# EAGLE board FTDI Basic_GiantPanel_3.3V_v24a (EAGLE 7.2.0), part 1 of 4
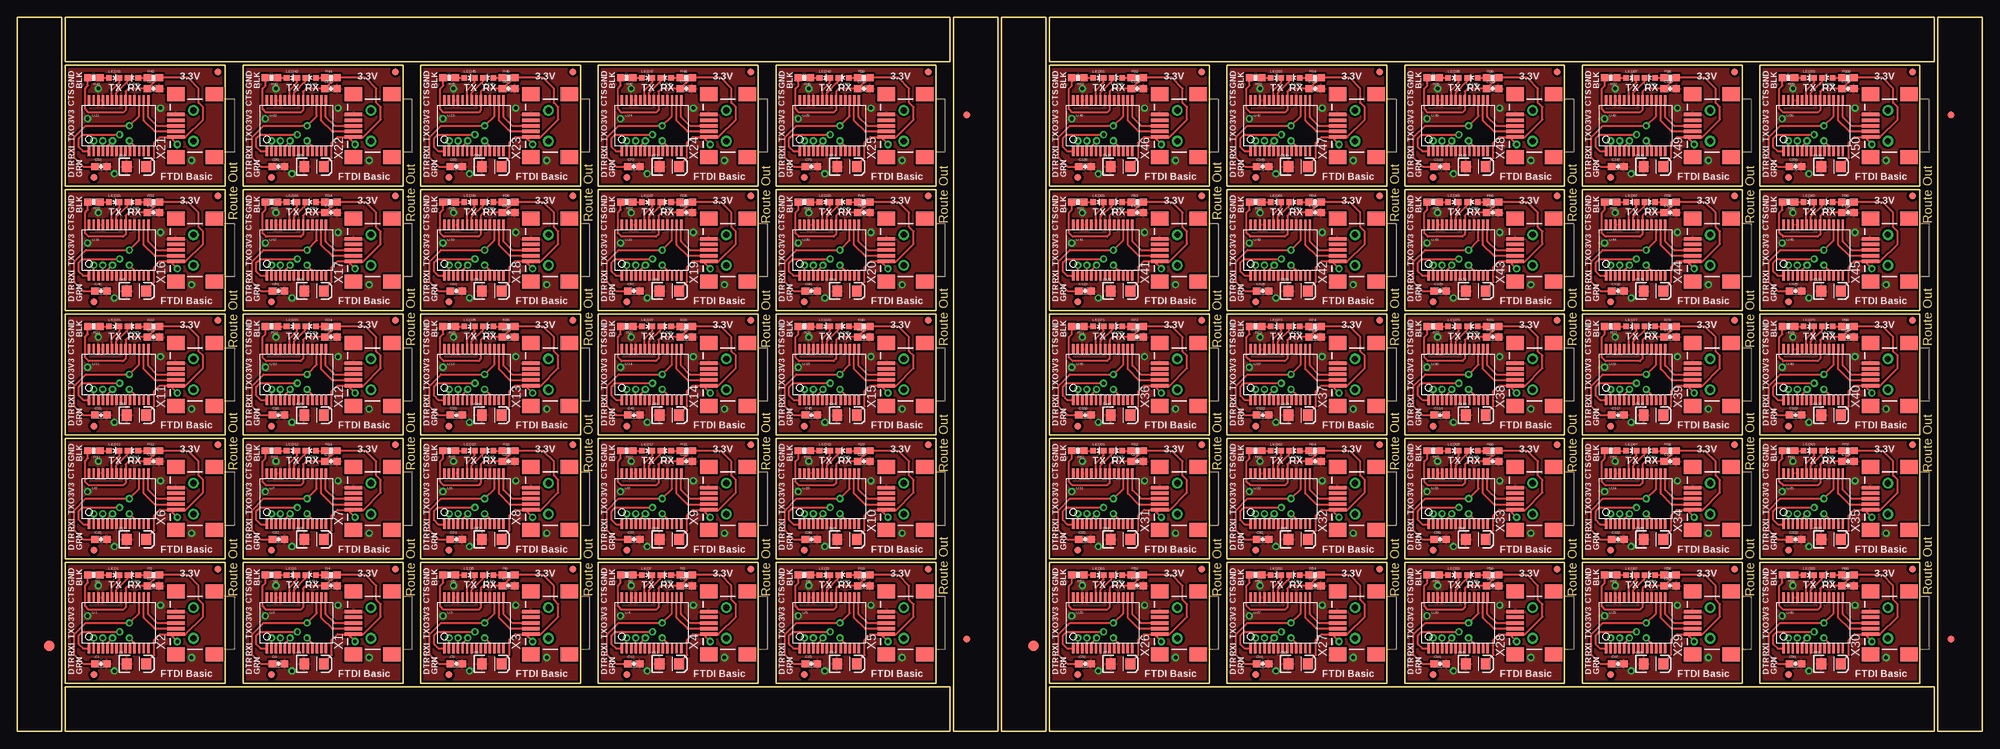
[diagram p0: board, top side]
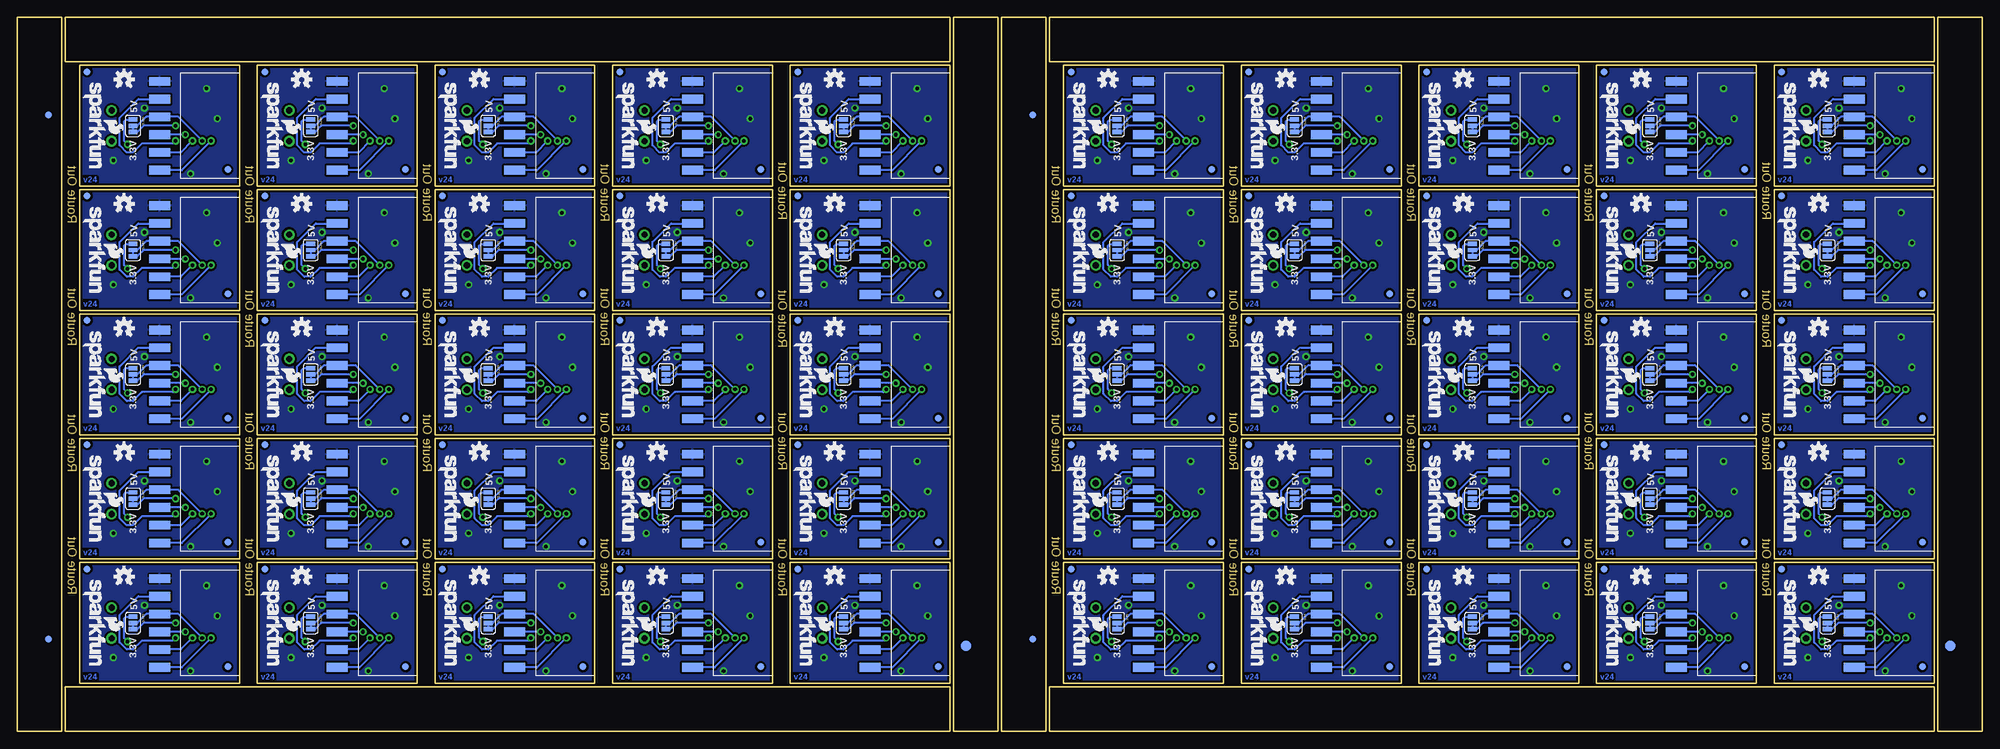
[diagram p1: board, bottom side, seen from below]

Size 280.92 x 102.11 mm. Coordinates in mm from the lower left corner, seen from the top.
Outline: 240 segments
Copper layers (1*16): Top 0.035mm / dielectric 1.5mm / Bottom 0.035mm
Design rules "SparkFun": minimum track width 8mil, minimum drill 20mil, track to track 8mil, track to pad 8mil, pad to pad 8mil, via to via 8mil, smd to smd 8mil, copper to edge 8mil, drill to drill 8mil, minimum pad ring 12mil, minimum via ring 10mil, stop-mask expansion 4mil, vias tented up to drill 20mil, thermal gap 10mil
Net classes: 0 default: width 0.203 mm; 1 power: width 0.254 mm

## Footprints (pad centres in the part's own frame; a part is rotated, then mirrored left to right if it is on the bottom)
0603-CAP = smd 1.1 x 1: 1 -0.85,0; 2 0.85,0
EIA3216 = smd 1.4 x 1.6: A 1.4,0; C -1.4,0
FIDUCIAL-1.5X3 = smd 1.5 x 1.5: 1 0,0
FIDUCIAL-1X2 = smd 1 x 1: 1 0,0
1X06-SMD-FEMALE-V2 = smd 1.25 x 3: 1 6.35,3.425; 2 3.81,3.425; 3 1.27,3.425; 4 -1.27,3.425; 5 -3.81,3.425; 6 -6.35,3.425
LED-0603 = smd 0.8 x 0.8: A 0,-0.75; C 0,0.75
0603-RES = smd 1.1 x 1: 1 -0.85,0; 2 0.85,0
SJ_3 = smd 0.635 x 1.27: 1 -0.889,0; 2 0,0; 3 0.889,0
SSOP28DB = smd 0.348 x 1.397: 1 -4.225,-3.656; 2 -3.575,-3.656; 3 -2.925,-3.656; 4 -2.275,-3.656; 5 -1.625,-3.656; 6 -0.975,-3.656; 7 -0.325,-3.656; 8 0.325,-3.656; 9 0.975,-3.656; 10 1.625,-3.656; 11 2.275,-3.656; 12 2.925,-3.656; 13 3.575,-3.656; 14 4.225,-3.656; 15 4.225,3.656; 16 3.575,3.656; 17 2.925,3.656; 18 2.275,3.656; 19 1.625,3.656; 20 0.975,3.656; 21 0.325,3.656; 22 -0.325,3.656; 23 -0.975,3.656; 24 -1.625,3.656; 25 -2.275,3.656; 26 -2.925,3.656; 27 -3.575,3.656; 28 -4.225,3.656
USB-MINIB-NOSTOP = smd 2.5 x 0.5: D+ 2.5,0; D- 2.5,0.8; GND 2.5,-1.6; ID 2.5,-0.8; VBUS 2.5,1.6 | smd 2.5 x 2: G1 -3,-4.5; G2 -3,4.5; G3 2.5,4.5; G4 2.5,-4.5 | drill 0.9 pad 0.8: H1 0,2.2 | drill 0.9 pad 0.787: H2 0,-2.2

## Placement (x,y rotation side)
C1  0.1uF  [0603-CAP]  11.94,9.65 0 top
C2  0.1uF  [0603-CAP]  19.43,20.83 0 top
C3  0.1uF  [0603-CAP]  44.83,20.83 0 top
C4  10uF  [EIA3216]  42.42,9.65 0 top
C5  10uF  [EIA3216]  17.02,9.65 0 top
C6  0.1uF  [0603-CAP]  37.34,9.65 0 top
C7  0.1uF  [0603-CAP]  70.23,20.83 0 top
C8  10uF  [EIA3216]  67.82,9.65 0 top
C9  0.1uF  [0603-CAP]  62.74,9.65 0 top
C10  0.1uF  [0603-CAP]  95.63,20.83 0 top
C11  10uF  [EIA3216]  93.22,9.65 0 top
C12  0.1uF  [0603-CAP]  88.14,9.65 0 top
C13  0.1uF  [0603-CAP]  121.03,20.83 0 top
C14  10uF  [EIA3216]  118.62,9.65 0 top
C15  0.1uF  [0603-CAP]  113.54,9.65 0 top
C16  0.1uF  [0603-CAP]  19.43,38.61 0 top
C17  10uF  [EIA3216]  17.02,27.43 0 top
C18  0.1uF  [0603-CAP]  11.94,27.43 0 top
C19  0.1uF  [0603-CAP]  44.83,38.61 0 top
C20  10uF  [EIA3216]  42.42,27.43 0 top
C21  0.1uF  [0603-CAP]  37.34,27.43 0 top
C22  0.1uF  [0603-CAP]  70.23,38.61 0 top
C23  10uF  [EIA3216]  67.82,27.43 0 top
C24  0.1uF  [0603-CAP]  62.74,27.43 0 top
C25  0.1uF  [0603-CAP]  95.63,38.61 0 top
C26  10uF  [EIA3216]  93.22,27.43 0 top
C27  0.1uF  [0603-CAP]  88.14,27.43 0 top
C28  0.1uF  [0603-CAP]  121.03,38.61 0 top
C29  10uF  [EIA3216]  118.62,27.43 0 top
C30  0.1uF  [0603-CAP]  113.54,27.43 0 top
C31  0.1uF  [0603-CAP]  19.43,56.39 0 top
C32  10uF  [EIA3216]  17.02,45.21 0 top
C33  0.1uF  [0603-CAP]  11.94,45.21 0 top
C34  0.1uF  [0603-CAP]  44.83,56.39 0 top
C35  10uF  [EIA3216]  42.42,45.21 0 top
C36  0.1uF  [0603-CAP]  37.34,45.21 0 top
C37  0.1uF  [0603-CAP]  70.23,56.39 0 top
C38  10uF  [EIA3216]  67.82,45.21 0 top
C39  0.1uF  [0603-CAP]  62.74,45.21 0 top
C40  0.1uF  [0603-CAP]  95.63,56.39 0 top
C41  10uF  [EIA3216]  93.22,45.21 0 top
C42  0.1uF  [0603-CAP]  88.14,45.21 0 top
C43  0.1uF  [0603-CAP]  121.03,56.39 0 top
C44  10uF  [EIA3216]  118.62,45.21 0 top
C45  0.1uF  [0603-CAP]  113.54,45.21 0 top
C46  0.1uF  [0603-CAP]  19.43,74.17 0 top
C47  10uF  [EIA3216]  17.02,62.99 0 top
C48  0.1uF  [0603-CAP]  11.94,62.99 0 top
C49  0.1uF  [0603-CAP]  44.83,74.17 0 top
C50  10uF  [EIA3216]  42.42,62.99 0 top
C51  0.1uF  [0603-CAP]  37.34,62.99 0 top
C52  0.1uF  [0603-CAP]  70.23,74.17 0 top
C53  10uF  [EIA3216]  67.82,62.99 0 top
C54  0.1uF  [0603-CAP]  62.74,62.99 0 top
C55  0.1uF  [0603-CAP]  95.63,74.17 0 top
C56  10uF  [EIA3216]  93.22,62.99 0 top
C57  0.1uF  [0603-CAP]  88.14,62.99 0 top
C58  0.1uF  [0603-CAP]  121.03,74.17 0 top
C59  10uF  [EIA3216]  118.62,62.99 0 top
C60  0.1uF  [0603-CAP]  113.54,62.99 0 top
C61  0.1uF  [0603-CAP]  19.43,91.95 0 top
C62  10uF  [EIA3216]  17.02,80.77 0 top
C63  0.1uF  [0603-CAP]  11.94,80.77 0 top
C64  0.1uF  [0603-CAP]  44.83,91.95 0 top
C65  10uF  [EIA3216]  42.42,80.77 0 top
C66  0.1uF  [0603-CAP]  37.34,80.77 0 top
C67  0.1uF  [0603-CAP]  70.23,91.95 0 top
C68  10uF  [EIA3216]  67.82,80.77 0 top
C69  0.1uF  [0603-CAP]  62.74,80.77 0 top
C70  0.1uF  [0603-CAP]  95.63,91.95 0 top
C71  10uF  [EIA3216]  93.22,80.77 0 top
C72  0.1uF  [0603-CAP]  88.14,80.77 0 top
C73  0.1uF  [0603-CAP]  121.03,91.95 0 top
C74  10uF  [EIA3216]  118.62,80.77 0 top
C75  0.1uF  [0603-CAP]  113.54,80.77 0 top
C76  0.1uF  [0603-CAP]  160.15,20.83 0 top
C77  10uF  [EIA3216]  157.73,9.65 0 top
C78  0.1uF  [0603-CAP]  152.65,9.65 0 top
C79  0.1uF  [0603-CAP]  185.55,20.83 0 top
C80  10uF  [EIA3216]  183.13,9.65 0 top
C81  0.1uF  [0603-CAP]  178.05,9.65 0 top
C82  0.1uF  [0603-CAP]  210.95,20.83 0 top
C83  10uF  [EIA3216]  208.53,9.65 0 top
C84  0.1uF  [0603-CAP]  203.45,9.65 0 top
C85  0.1uF  [0603-CAP]  236.35,20.83 0 top
C86  10uF  [EIA3216]  233.93,9.65 0 top
C87  0.1uF  [0603-CAP]  228.85,9.65 0 top
C88  0.1uF  [0603-CAP]  261.75,20.83 0 top
C89  10uF  [EIA3216]  259.33,9.65 0 top
C90  0.1uF  [0603-CAP]  254.25,9.65 0 top
C91  0.1uF  [0603-CAP]  160.15,38.61 0 top
C92  10uF  [EIA3216]  157.73,27.43 0 top
C93  0.1uF  [0603-CAP]  152.65,27.43 0 top
C94  0.1uF  [0603-CAP]  185.55,38.61 0 top
C95  10uF  [EIA3216]  183.13,27.43 0 top
C96  0.1uF  [0603-CAP]  178.05,27.43 0 top
C97  0.1uF  [0603-CAP]  210.95,38.61 0 top
C98  10uF  [EIA3216]  208.53,27.43 0 top
C99  0.1uF  [0603-CAP]  203.45,27.43 0 top
C100  0.1uF  [0603-CAP]  236.35,38.61 0 top
C101  10uF  [EIA3216]  233.93,27.43 0 top
C102  0.1uF  [0603-CAP]  228.85,27.43 0 top
C103  0.1uF  [0603-CAP]  261.75,38.61 0 top
C104  10uF  [EIA3216]  259.33,27.43 0 top
C105  0.1uF  [0603-CAP]  254.25,27.43 0 top
C106  0.1uF  [0603-CAP]  160.15,56.39 0 top
C107  10uF  [EIA3216]  157.73,45.21 0 top
C108  0.1uF  [0603-CAP]  152.65,45.21 0 top
C109  0.1uF  [0603-CAP]  185.55,56.39 0 top
C110  10uF  [EIA3216]  183.13,45.21 0 top
C111  0.1uF  [0603-CAP]  178.05,45.21 0 top
C112  0.1uF  [0603-CAP]  210.95,56.39 0 top
C113  10uF  [EIA3216]  208.53,45.21 0 top
C114  0.1uF  [0603-CAP]  203.45,45.21 0 top
C115  0.1uF  [0603-CAP]  236.35,56.39 0 top
C116  10uF  [EIA3216]  233.93,45.21 0 top
C117  0.1uF  [0603-CAP]  228.85,45.21 0 top
C118  0.1uF  [0603-CAP]  261.75,56.39 0 top
C119  10uF  [EIA3216]  259.33,45.21 0 top
C120  0.1uF  [0603-CAP]  254.25,45.21 0 top
C121  0.1uF  [0603-CAP]  160.15,74.17 0 top
C122  10uF  [EIA3216]  157.73,62.99 0 top
C123  0.1uF  [0603-CAP]  152.65,62.99 0 top
C124  0.1uF  [0603-CAP]  185.55,74.17 0 top
C125  10uF  [EIA3216]  183.13,62.99 0 top
C126  0.1uF  [0603-CAP]  178.05,62.99 0 top
C127  0.1uF  [0603-CAP]  210.95,74.17 0 top
C128  10uF  [EIA3216]  208.53,62.99 0 top
C129  0.1uF  [0603-CAP]  203.45,62.99 0 top
C130  0.1uF  [0603-CAP]  236.35,74.17 0 top
C131  10uF  [EIA3216]  233.93,62.99 0 top
C132  0.1uF  [0603-CAP]  228.85,62.99 0 top
C133  0.1uF  [0603-CAP]  261.75,74.17 0 top
C134  10uF  [EIA3216]  259.33,62.99 0 top
C135  0.1uF  [0603-CAP]  254.25,62.99 0 top
C136  0.1uF  [0603-CAP]  160.15,91.95 0 top
C137  10uF  [EIA3216]  157.73,80.77 0 top
C138  0.1uF  [0603-CAP]  152.65,80.77 0 top
C139  0.1uF  [0603-CAP]  185.55,91.95 0 top
C140  10uF  [EIA3216]  183.13,80.77 0 top
C141  0.1uF  [0603-CAP]  178.05,80.77 0 top
C142  0.1uF  [0603-CAP]  210.95,91.95 0 top
C143  10uF  [EIA3216]  208.53,80.77 0 top
C144  0.1uF  [0603-CAP]  203.45,80.77 0 top
C145  0.1uF  [0603-CAP]  236.35,91.95 0 top
C146  10uF  [EIA3216]  233.93,80.77 0 top
C147  0.1uF  [0603-CAP]  228.85,80.77 0 top
C148  0.1uF  [0603-CAP]  261.75,91.95 0 top
C149  10uF  [EIA3216]  259.33,80.77 0 top
C150  0.1uF  [0603-CAP]  254.25,80.77 0 top
E$1  [FIDUCIAL-1.5X3]  4.57,12.19 0 top
E$2  [FIDUCIAL-1.5X3]  4.57,12.19 0 bottom
E$3  [FIDUCIAL-1X2]  135.76,13.21 0 bottom
E$4  [FIDUCIAL-1X2]  135.76,13.21 0 top
E$5  [FIDUCIAL-1X2]  135.76,88.14 180 top
E$6  [FIDUCIAL-1X2]  135.76,88.14 180 bottom
E$7  [FIDUCIAL-1X2]  276.48,13.21 0 top
E$8  [FIDUCIAL-1X2]  276.48,88.14 180 top
E$9  [FIDUCIAL-1.5X3]  145.29,12.19 0 top
E$10  [FIDUCIAL-1.5X3]  145.29,12.19 0 bottom
E$11  [FIDUCIAL-1X2]  276.48,13.21 0 bottom
E$12  [FIDUCIAL-1X2]  276.48,88.14 180 bottom
JP1  [1X06-SMD-FEMALE-V2]  14.86,15.49 90 bottom
JP2  LOGO-SFESK  [SFE-LOGO-FLAME]  26.29,16.26 270 bottom
JP3  FIDUCIAL1X2  [FIDUCIAL-1X2]  10.92,8.1 0 top
JP4  FIDUCIAL1X2  [FIDUCIAL-1X2]  28.65,23.22 0 top
JP5  FIDUCIAL1X2  [FIDUCIAL-1X2]  8.53,9.25 0 bottom
JP6  FIDUCIAL1X2  [FIDUCIAL-1X2]  28.65,23.22 0 bottom
JP7  LOGO-SFESK  [SFE-LOGO-FLAME]  51.69,16.26 270 bottom
JP8  [1X06-SMD-FEMALE-V2]  40.26,15.49 90 bottom
JP9  FIDUCIAL1X2  [FIDUCIAL-1X2]  36.32,8.1 0 top
JP10  FIDUCIAL1X2  [FIDUCIAL-1X2]  54.05,23.22 0 top
JP11  FIDUCIAL1X2  [FIDUCIAL-1X2]  33.93,9.25 0 bottom
JP12  FIDUCIAL1X2  [FIDUCIAL-1X2]  54.05,23.22 0 bottom
JP13  LOGO-SFESK  [SFE-LOGO-FLAME]  77.09,16.26 270 bottom
JP14  [1X06-SMD-FEMALE-V2]  65.66,15.49 90 bottom
JP15  FIDUCIAL1X2  [FIDUCIAL-1X2]  61.72,8.1 0 top
JP16  FIDUCIAL1X2  [FIDUCIAL-1X2]  79.45,23.22 0 top
JP17  FIDUCIAL1X2  [FIDUCIAL-1X2]  59.33,9.25 0 bottom
JP18  FIDUCIAL1X2  [FIDUCIAL-1X2]  79.45,23.22 0 bottom
JP19  LOGO-SFESK  [SFE-LOGO-FLAME]  102.49,16.26 270 bottom
JP20  [1X06-SMD-FEMALE-V2]  91.06,15.49 90 bottom
JP21  FIDUCIAL1X2  [FIDUCIAL-1X2]  87.12,8.1 0 top
JP22  FIDUCIAL1X2  [FIDUCIAL-1X2]  104.85,23.22 0 top
JP23  FIDUCIAL1X2  [FIDUCIAL-1X2]  84.73,9.25 0 bottom
JP24  FIDUCIAL1X2  [FIDUCIAL-1X2]  104.85,23.22 0 bottom
JP25  LOGO-SFESK  [SFE-LOGO-FLAME]  127.89,16.26 270 bottom
JP26  [1X06-SMD-FEMALE-V2]  116.46,15.49 90 bottom
JP27  FIDUCIAL1X2  [FIDUCIAL-1X2]  112.52,8.1 0 top
JP28  FIDUCIAL1X2  [FIDUCIAL-1X2]  130.25,23.22 0 top
JP29  FIDUCIAL1X2  [FIDUCIAL-1X2]  110.13,9.25 0 bottom
JP30  FIDUCIAL1X2  [FIDUCIAL-1X2]  130.25,23.22 0 bottom
JP31  LOGO-SFESK  [SFE-LOGO-FLAME]  26.29,34.04 270 bottom
JP32  [1X06-SMD-FEMALE-V2]  14.86,33.27 90 bottom
JP33  FIDUCIAL1X2  [FIDUCIAL-1X2]  10.92,25.88 0 top
JP34  FIDUCIAL1X2  [FIDUCIAL-1X2]  28.65,41 0 top
JP35  FIDUCIAL1X2  [FIDUCIAL-1X2]  8.53,27.03 0 bottom
JP36  FIDUCIAL1X2  [FIDUCIAL-1X2]  28.65,41 0 bottom
JP37  LOGO-SFESK  [SFE-LOGO-FLAME]  51.69,34.04 270 bottom
JP38  [1X06-SMD-FEMALE-V2]  40.26,33.27 90 bottom
JP39  FIDUCIAL1X2  [FIDUCIAL-1X2]  36.32,25.88 0 top
JP40  FIDUCIAL1X2  [FIDUCIAL-1X2]  54.05,41 0 top
JP41  FIDUCIAL1X2  [FIDUCIAL-1X2]  33.93,27.03 0 bottom
JP42  FIDUCIAL1X2  [FIDUCIAL-1X2]  54.05,41 0 bottom
JP43  LOGO-SFESK  [SFE-LOGO-FLAME]  77.09,34.04 270 bottom
JP44  [1X06-SMD-FEMALE-V2]  65.66,33.27 90 bottom
JP45  FIDUCIAL1X2  [FIDUCIAL-1X2]  61.72,25.88 0 top
JP46  FIDUCIAL1X2  [FIDUCIAL-1X2]  79.45,41 0 top
JP47  FIDUCIAL1X2  [FIDUCIAL-1X2]  59.33,27.03 0 bottom
JP48  FIDUCIAL1X2  [FIDUCIAL-1X2]  79.45,41 0 bottom
JP49  LOGO-SFESK  [SFE-LOGO-FLAME]  102.49,34.04 270 bottom
JP50  [1X06-SMD-FEMALE-V2]  91.06,33.27 90 bottom
JP51  FIDUCIAL1X2  [FIDUCIAL-1X2]  87.12,25.88 0 top
JP52  FIDUCIAL1X2  [FIDUCIAL-1X2]  104.85,41 0 top
JP53  FIDUCIAL1X2  [FIDUCIAL-1X2]  84.73,27.03 0 bottom
JP54  FIDUCIAL1X2  [FIDUCIAL-1X2]  104.85,41 0 bottom
JP55  LOGO-SFESK  [SFE-LOGO-FLAME]  127.89,34.04 270 bottom
JP56  [1X06-SMD-FEMALE-V2]  116.46,33.27 90 bottom
JP57  FIDUCIAL1X2  [FIDUCIAL-1X2]  112.52,25.88 0 top
JP58  FIDUCIAL1X2  [FIDUCIAL-1X2]  130.25,41 0 top
JP59  FIDUCIAL1X2  [FIDUCIAL-1X2]  110.13,27.03 0 bottom
JP60  FIDUCIAL1X2  [FIDUCIAL-1X2]  130.25,41 0 bottom
JP61  LOGO-SFESK  [SFE-LOGO-FLAME]  26.29,51.82 270 bottom
JP62  [1X06-SMD-FEMALE-V2]  14.86,51.05 90 bottom
JP63  FIDUCIAL1X2  [FIDUCIAL-1X2]  10.92,43.66 0 top
JP64  FIDUCIAL1X2  [FIDUCIAL-1X2]  28.65,58.78 0 top
JP65  FIDUCIAL1X2  [FIDUCIAL-1X2]  8.53,44.81 0 bottom
JP66  FIDUCIAL1X2  [FIDUCIAL-1X2]  28.65,58.78 0 bottom
JP67  LOGO-SFESK  [SFE-LOGO-FLAME]  51.69,51.82 270 bottom
JP68  [1X06-SMD-FEMALE-V2]  40.26,51.05 90 bottom
JP69  FIDUCIAL1X2  [FIDUCIAL-1X2]  36.32,43.66 0 top
JP70  FIDUCIAL1X2  [FIDUCIAL-1X2]  54.05,58.78 0 top
JP71  FIDUCIAL1X2  [FIDUCIAL-1X2]  33.93,44.81 0 bottom
JP72  FIDUCIAL1X2  [FIDUCIAL-1X2]  54.05,58.78 0 bottom
JP73  LOGO-SFESK  [SFE-LOGO-FLAME]  77.09,51.82 270 bottom
JP74  [1X06-SMD-FEMALE-V2]  65.66,51.05 90 bottom
JP75  FIDUCIAL1X2  [FIDUCIAL-1X2]  61.72,43.66 0 top
JP76  FIDUCIAL1X2  [FIDUCIAL-1X2]  79.45,58.78 0 top
JP77  FIDUCIAL1X2  [FIDUCIAL-1X2]  59.33,44.81 0 bottom
JP78  FIDUCIAL1X2  [FIDUCIAL-1X2]  79.45,58.78 0 bottom
JP79  LOGO-SFESK  [SFE-LOGO-FLAME]  102.49,51.82 270 bottom
JP80  [1X06-SMD-FEMALE-V2]  91.06,51.05 90 bottom
JP81  FIDUCIAL1X2  [FIDUCIAL-1X2]  87.12,43.66 0 top
JP82  FIDUCIAL1X2  [FIDUCIAL-1X2]  104.85,58.78 0 top
JP83  FIDUCIAL1X2  [FIDUCIAL-1X2]  84.73,44.81 0 bottom
JP84  FIDUCIAL1X2  [FIDUCIAL-1X2]  104.85,58.78 0 bottom
JP85  LOGO-SFESK  [SFE-LOGO-FLAME]  127.89,51.82 270 bottom
JP86  [1X06-SMD-FEMALE-V2]  116.46,51.05 90 bottom
JP87  FIDUCIAL1X2  [FIDUCIAL-1X2]  112.52,43.66 0 top
JP88  FIDUCIAL1X2  [FIDUCIAL-1X2]  130.25,58.78 0 top
JP89  FIDUCIAL1X2  [FIDUCIAL-1X2]  110.13,44.81 0 bottom
JP90  FIDUCIAL1X2  [FIDUCIAL-1X2]  130.25,58.78 0 bottom
JP91  LOGO-SFESK  [SFE-LOGO-FLAME]  26.29,69.6 270 bottom
JP92  [1X06-SMD-FEMALE-V2]  14.86,68.83 90 bottom
JP93  FIDUCIAL1X2  [FIDUCIAL-1X2]  10.92,61.44 0 top
JP94  FIDUCIAL1X2  [FIDUCIAL-1X2]  28.65,76.56 0 top
JP95  FIDUCIAL1X2  [FIDUCIAL-1X2]  8.53,62.59 0 bottom
JP96  FIDUCIAL1X2  [FIDUCIAL-1X2]  28.65,76.56 0 bottom
JP97  LOGO-SFESK  [SFE-LOGO-FLAME]  51.69,69.6 270 bottom
JP98  [1X06-SMD-FEMALE-V2]  40.26,68.83 90 bottom
JP99  FIDUCIAL1X2  [FIDUCIAL-1X2]  36.32,61.44 0 top
JP100  FIDUCIAL1X2  [FIDUCIAL-1X2]  54.05,76.56 0 top
JP101  FIDUCIAL1X2  [FIDUCIAL-1X2]  33.93,62.59 0 bottom
JP102  FIDUCIAL1X2  [FIDUCIAL-1X2]  54.05,76.56 0 bottom
JP103  LOGO-SFESK  [SFE-LOGO-FLAME]  77.09,69.6 270 bottom
JP104  [1X06-SMD-FEMALE-V2]  65.66,68.83 90 bottom
JP105  FIDUCIAL1X2  [FIDUCIAL-1X2]  61.72,61.44 0 top
JP106  FIDUCIAL1X2  [FIDUCIAL-1X2]  79.45,76.56 0 top
JP107  FIDUCIAL1X2  [FIDUCIAL-1X2]  59.33,62.59 0 bottom
JP108  FIDUCIAL1X2  [FIDUCIAL-1X2]  79.45,76.56 0 bottom
JP109  LOGO-SFESK  [SFE-LOGO-FLAME]  102.49,69.6 270 bottom
JP110  [1X06-SMD-FEMALE-V2]  91.06,68.83 90 bottom
JP111  FIDUCIAL1X2  [FIDUCIAL-1X2]  87.12,61.44 0 top
JP112  FIDUCIAL1X2  [FIDUCIAL-1X2]  104.85,76.56 0 top
JP113  FIDUCIAL1X2  [FIDUCIAL-1X2]  84.73,62.59 0 bottom
JP114  FIDUCIAL1X2  [FIDUCIAL-1X2]  104.85,76.56 0 bottom
JP115  LOGO-SFESK  [SFE-LOGO-FLAME]  127.89,69.6 270 bottom
JP116  [1X06-SMD-FEMALE-V2]  116.46,68.83 90 bottom
JP117  FIDUCIAL1X2  [FIDUCIAL-1X2]  112.52,61.44 0 top
JP118  FIDUCIAL1X2  [FIDUCIAL-1X2]  130.25,76.56 0 top
JP119  FIDUCIAL1X2  [FIDUCIAL-1X2]  110.13,62.59 0 bottom
JP120  FIDUCIAL1X2  [FIDUCIAL-1X2]  130.25,76.56 0 bottom
JP121  LOGO-SFESK  [SFE-LOGO-FLAME]  26.29,87.38 270 bottom
JP122  [1X06-SMD-FEMALE-V2]  14.86,86.61 90 bottom
JP123  FIDUCIAL1X2  [FIDUCIAL-1X2]  10.92,79.22 0 top
JP124  FIDUCIAL1X2  [FIDUCIAL-1X2]  28.65,94.34 0 top
JP125  FIDUCIAL1X2  [FIDUCIAL-1X2]  8.53,80.37 0 bottom
JP126  FIDUCIAL1X2  [FIDUCIAL-1X2]  28.65,94.34 0 bottom
JP127  LOGO-SFESK  [SFE-LOGO-FLAME]  51.69,87.38 270 bottom
JP128  [1X06-SMD-FEMALE-V2]  40.26,86.61 90 bottom
JP129  FIDUCIAL1X2  [FIDUCIAL-1X2]  36.32,79.22 0 top
JP130  FIDUCIAL1X2  [FIDUCIAL-1X2]  54.05,94.34 0 top
JP131  FIDUCIAL1X2  [FIDUCIAL-1X2]  33.93,80.37 0 bottom
JP132  FIDUCIAL1X2  [FIDUCIAL-1X2]  54.05,94.34 0 bottom
JP133  LOGO-SFESK  [SFE-LOGO-FLAME]  77.09,87.38 270 bottom
JP134  [1X06-SMD-FEMALE-V2]  65.66,86.61 90 bottom
JP135  FIDUCIAL1X2  [FIDUCIAL-1X2]  61.72,79.22 0 top
JP136  FIDUCIAL1X2  [FIDUCIAL-1X2]  79.45,94.34 0 top
JP137  FIDUCIAL1X2  [FIDUCIAL-1X2]  59.33,80.37 0 bottom
JP138  FIDUCIAL1X2  [FIDUCIAL-1X2]  79.45,94.34 0 bottom
JP139  LOGO-SFESK  [SFE-LOGO-FLAME]  102.49,87.38 270 bottom
JP140  [1X06-SMD-FEMALE-V2]  91.06,86.61 90 bottom
JP141  FIDUCIAL1X2  [FIDUCIAL-1X2]  87.12,79.22 0 top
JP142  FIDUCIAL1X2  [FIDUCIAL-1X2]  104.85,94.34 0 top
JP143  FIDUCIAL1X2  [FIDUCIAL-1X2]  84.73,80.37 0 bottom
JP144  FIDUCIAL1X2  [FIDUCIAL-1X2]  104.85,94.34 0 bottom
JP145  LOGO-SFESK  [SFE-LOGO-FLAME]  127.89,87.38 270 bottom
JP146  [1X06-SMD-FEMALE-V2]  116.46,86.61 90 bottom
JP147  FIDUCIAL1X2  [FIDUCIAL-1X2]  112.52,79.22 0 top
JP148  FIDUCIAL1X2  [FIDUCIAL-1X2]  130.25,94.34 0 top
JP149  FIDUCIAL1X2  [FIDUCIAL-1X2]  110.13,80.37 0 bottom
JP150  FIDUCIAL1X2  [FIDUCIAL-1X2]  130.25,94.34 0 bottom
JP151  LOGO-SFESK  [SFE-LOGO-FLAME]  167,16.26 270 bottom
JP152  [1X06-SMD-FEMALE-V2]  155.57,15.49 90 bottom
JP153  FIDUCIAL1X2  [FIDUCIAL-1X2]  151.64,8.1 0 top
JP154  FIDUCIAL1X2  [FIDUCIAL-1X2]  169.37,23.22 0 top
JP155  FIDUCIAL1X2  [FIDUCIAL-1X2]  149.25,9.25 0 bottom
JP156  FIDUCIAL1X2  [FIDUCIAL-1X2]  169.37,23.22 0 bottom
JP157  LOGO-SFESK  [SFE-LOGO-FLAME]  192.41,16.26 270 bottom
JP158  [1X06-SMD-FEMALE-V2]  180.97,15.49 90 bottom
JP159  FIDUCIAL1X2  [FIDUCIAL-1X2]  177.04,8.1 0 top
JP160  FIDUCIAL1X2  [FIDUCIAL-1X2]  194.77,23.22 0 top
JP161  FIDUCIAL1X2  [FIDUCIAL-1X2]  174.65,9.25 0 bottom
JP162  FIDUCIAL1X2  [FIDUCIAL-1X2]  194.77,23.22 0 bottom
JP163  LOGO-SFESK  [SFE-LOGO-FLAME]  217.81,16.26 270 bottom
JP164  [1X06-SMD-FEMALE-V2]  206.38,15.49 90 bottom
JP165  FIDUCIAL1X2  [FIDUCIAL-1X2]  202.44,8.1 0 top
JP166  FIDUCIAL1X2  [FIDUCIAL-1X2]  220.17,23.22 0 top
JP167  FIDUCIAL1X2  [FIDUCIAL-1X2]  200.05,9.25 0 bottom
JP168  FIDUCIAL1X2  [FIDUCIAL-1X2]  220.17,23.22 0 bottom
JP169  LOGO-SFESK  [SFE-LOGO-FLAME]  243.21,16.26 270 bottom
JP170  [1X06-SMD-FEMALE-V2]  231.78,15.49 90 bottom
JP171  FIDUCIAL1X2  [FIDUCIAL-1X2]  227.84,8.1 0 top
JP172  FIDUCIAL1X2  [FIDUCIAL-1X2]  245.57,23.22 0 top
JP173  FIDUCIAL1X2  [FIDUCIAL-1X2]  225.45,9.25 0 bottom
JP174  FIDUCIAL1X2  [FIDUCIAL-1X2]  245.57,23.22 0 bottom
JP175  LOGO-SFESK  [SFE-LOGO-FLAME]  268.61,16.26 270 bottom
JP176  [1X06-SMD-FEMALE-V2]  257.18,15.49 90 bottom
JP177  FIDUCIAL1X2  [FIDUCIAL-1X2]  253.24,8.1 0 top
JP178  FIDUCIAL1X2  [FIDUCIAL-1X2]  270.97,23.22 0 top
JP179  FIDUCIAL1X2  [FIDUCIAL-1X2]  250.85,9.25 0 bottom
JP180  FIDUCIAL1X2  [FIDUCIAL-1X2]  270.97,23.22 0 bottom
JP181  LOGO-SFESK  [SFE-LOGO-FLAME]  167,34.04 270 bottom
JP182  [1X06-SMD-FEMALE-V2]  155.57,33.27 90 bottom
JP183  FIDUCIAL1X2  [FIDUCIAL-1X2]  151.64,25.88 0 top
JP184  FIDUCIAL1X2  [FIDUCIAL-1X2]  169.37,41 0 top
JP185  FIDUCIAL1X2  [FIDUCIAL-1X2]  149.25,27.03 0 bottom
JP186  FIDUCIAL1X2  [FIDUCIAL-1X2]  169.37,41 0 bottom
JP187  LOGO-SFESK  [SFE-LOGO-FLAME]  192.41,34.04 270 bottom
JP188  [1X06-SMD-FEMALE-V2]  180.97,33.27 90 bottom
JP189  FIDUCIAL1X2  [FIDUCIAL-1X2]  177.04,25.88 0 top
JP190  FIDUCIAL1X2  [FIDUCIAL-1X2]  194.77,41 0 top
JP191  FIDUCIAL1X2  [FIDUCIAL-1X2]  174.65,27.03 0 bottom
JP192  FIDUCIAL1X2  [FIDUCIAL-1X2]  194.77,41 0 bottom
JP193  LOGO-SFESK  [SFE-LOGO-FLAME]  217.81,34.04 270 bottom
JP194  [1X06-SMD-FEMALE-V2]  206.38,33.27 90 bottom
JP195  FIDUCIAL1X2  [FIDUCIAL-1X2]  202.44,25.88 0 top
JP196  FIDUCIAL1X2  [FIDUCIAL-1X2]  220.17,41 0 top
JP197  FIDUCIAL1X2  [FIDUCIAL-1X2]  200.05,27.03 0 bottom
JP198  FIDUCIAL1X2  [FIDUCIAL-1X2]  220.17,41 0 bottom
JP199  LOGO-SFESK  [SFE-LOGO-FLAME]  243.21,34.04 270 bottom
JP200  [1X06-SMD-FEMALE-V2]  231.78,33.27 90 bottom
JP201  FIDUCIAL1X2  [FIDUCIAL-1X2]  227.84,25.88 0 top
JP202  FIDUCIAL1X2  [FIDUCIAL-1X2]  245.57,41 0 top
JP203  FIDUCIAL1X2  [FIDUCIAL-1X2]  225.45,27.03 0 bottom
JP204  FIDUCIAL1X2  [FIDUCIAL-1X2]  245.57,41 0 bottom
JP205  LOGO-SFESK  [SFE-LOGO-FLAME]  268.61,34.04 270 bottom
JP206  [1X06-SMD-FEMALE-V2]  257.18,33.27 90 bottom
JP207  FIDUCIAL1X2  [FIDUCIAL-1X2]  253.24,25.88 0 top
JP208  FIDUCIAL1X2  [FIDUCIAL-1X2]  270.97,41 0 top
JP209  FIDUCIAL1X2  [FIDUCIAL-1X2]  250.85,27.03 0 bottom
JP210  FIDUCIAL1X2  [FIDUCIAL-1X2]  270.97,41 0 bottom
JP211  LOGO-SFESK  [SFE-LOGO-FLAME]  167,51.82 270 bottom
JP212  [1X06-SMD-FEMALE-V2]  155.57,51.05 90 bottom
JP213  FIDUCIAL1X2  [FIDUCIAL-1X2]  151.64,43.66 0 top
JP214  FIDUCIAL1X2  [FIDUCIAL-1X2]  169.37,58.78 0 top
JP215  FIDUCIAL1X2  [FIDUCIAL-1X2]  149.25,44.81 0 bottom
JP216  FIDUCIAL1X2  [FIDUCIAL-1X2]  169.37,58.78 0 bottom
JP217  LOGO-SFESK  [SFE-LOGO-FLAME]  192.41,51.82 270 bottom
JP218  [1X06-SMD-FEMALE-V2]  180.97,51.05 90 bottom
JP219  FIDUCIAL1X2  [FIDUCIAL-1X2]  177.04,43.66 0 top
JP220  FIDUCIAL1X2  [FIDUCIAL-1X2]  194.77,58.78 0 top
JP221  FIDUCIAL1X2  [FIDUCIAL-1X2]  174.65,44.81 0 bottom
JP222  FIDUCIAL1X2  [FIDUCIAL-1X2]  194.77,58.78 0 bottom
JP223  LOGO-SFESK  [SFE-LOGO-FLAME]  217.81,51.82 270 bottom
JP224  [1X06-SMD-FEMALE-V2]  206.38,51.05 90 bottom
JP225  FIDUCIAL1X2  [FIDUCIAL-1X2]  202.44,43.66 0 top
JP226  FIDUCIAL1X2  [FIDUCIAL-1X2]  220.17,58.78 0 top
JP227  FIDUCIAL1X2  [FIDUCIAL-1X2]  200.05,44.81 0 bottom
JP228  FIDUCIAL1X2  [FIDUCIAL-1X2]  220.17,58.78 0 bottom
JP229  LOGO-SFESK  [SFE-LOGO-FLAME]  243.21,51.82 270 bottom
JP230  [1X06-SMD-FEMALE-V2]  231.78,51.05 90 bottom
JP231  FIDUCIAL1X2  [FIDUCIAL-1X2]  227.84,43.66 0 top
JP232  FIDUCIAL1X2  [FIDUCIAL-1X2]  245.57,58.78 0 top
JP233  FIDUCIAL1X2  [FIDUCIAL-1X2]  225.45,44.81 0 bottom
JP234  FIDUCIAL1X2  [FIDUCIAL-1X2]  245.57,58.78 0 bottom
JP235  LOGO-SFESK  [SFE-LOGO-FLAME]  268.61,51.82 270 bottom
JP236  [1X06-SMD-FEMALE-V2]  257.18,51.05 90 bottom
JP237  FIDUCIAL1X2  [FIDUCIAL-1X2]  253.24,43.66 0 top
JP238  FIDUCIAL1X2  [FIDUCIAL-1X2]  270.97,58.78 0 top
JP239  FIDUCIAL1X2  [FIDUCIAL-1X2]  250.85,44.81 0 bottom
JP240  FIDUCIAL1X2  [FIDUCIAL-1X2]  270.97,58.78 0 bottom
JP241  LOGO-SFESK  [SFE-LOGO-FLAME]  167,69.6 270 bottom
JP242  [1X06-SMD-FEMALE-V2]  155.57,68.83 90 bottom
JP243  FIDUCIAL1X2  [FIDUCIAL-1X2]  151.64,61.44 0 top
JP244  FIDUCIAL1X2  [FIDUCIAL-1X2]  169.37,76.56 0 top
JP245  FIDUCIAL1X2  [FIDUCIAL-1X2]  149.25,62.59 0 bottom
JP246  FIDUCIAL1X2  [FIDUCIAL-1X2]  169.37,76.56 0 bottom
JP247  LOGO-SFESK  [SFE-LOGO-FLAME]  192.41,69.6 270 bottom
JP248  [1X06-SMD-FEMALE-V2]  180.97,68.83 90 bottom
JP249  FIDUCIAL1X2  [FIDUCIAL-1X2]  177.04,61.44 0 top
JP250  FIDUCIAL1X2  [FIDUCIAL-1X2]  194.77,76.56 0 top
JP251  FIDUCIAL1X2  [FIDUCIAL-1X2]  174.65,62.59 0 bottom
JP252  FIDUCIAL1X2  [FIDUCIAL-1X2]  194.77,76.56 0 bottom
JP253  LOGO-SFESK  [SFE-LOGO-FLAME]  217.81,69.6 270 bottom
JP254  [1X06-SMD-FEMALE-V2]  206.38,68.83 90 bottom
JP255  FIDUCIAL1X2  [FIDUCIAL-1X2]  202.44,61.44 0 top
JP256  FIDUCIAL1X2  [FIDUCIAL-1X2]  220.17,76.56 0 top
JP257  FIDUCIAL1X2  [FIDUCIAL-1X2]  200.05,62.59 0 bottom
JP258  FIDUCIAL1X2  [FIDUCIAL-1X2]  220.17,76.56 0 bottom
JP259  LOGO-SFESK  [SFE-LOGO-FLAME]  243.21,69.6 270 bottom
JP260  [1X06-SMD-FEMALE-V2]  231.78,68.83 90 bottom
JP261  FIDUCIAL1X2  [FIDUCIAL-1X2]  227.84,61.44 0 top
JP262  FIDUCIAL1X2  [FIDUCIAL-1X2]  245.57,76.56 0 top
JP263  FIDUCIAL1X2  [FIDUCIAL-1X2]  225.45,62.59 0 bottom
JP264  FIDUCIAL1X2  [FIDUCIAL-1X2]  245.57,76.56 0 bottom
JP265  LOGO-SFESK  [SFE-LOGO-FLAME]  268.61,69.6 270 bottom
JP266  [1X06-SMD-FEMALE-V2]  257.18,68.83 90 bottom
JP267  FIDUCIAL1X2  [FIDUCIAL-1X2]  253.24,61.44 0 top
JP268  FIDUCIAL1X2  [FIDUCIAL-1X2]  270.97,76.56 0 top
JP269  FIDUCIAL1X2  [FIDUCIAL-1X2]  250.85,62.59 0 bottom
JP270  FIDUCIAL1X2  [FIDUCIAL-1X2]  270.97,76.56 0 bottom
JP271  LOGO-SFESK  [SFE-LOGO-FLAME]  167,87.38 270 bottom
JP272  [1X06-SMD-FEMALE-V2]  155.57,86.61 90 bottom
JP273  FIDUCIAL1X2  [FIDUCIAL-1X2]  151.64,79.22 0 top
JP274  FIDUCIAL1X2  [FIDUCIAL-1X2]  169.37,94.34 0 top
JP275  FIDUCIAL1X2  [FIDUCIAL-1X2]  149.25,80.37 0 bottom
JP276  FIDUCIAL1X2  [FIDUCIAL-1X2]  169.37,94.34 0 bottom
JP277  LOGO-SFESK  [SFE-LOGO-FLAME]  192.41,87.38 270 bottom
JP278  [1X06-SMD-FEMALE-V2]  180.97,86.61 90 bottom
JP279  FIDUCIAL1X2  [FIDUCIAL-1X2]  177.04,79.22 0 top
JP280  FIDUCIAL1X2  [FIDUCIAL-1X2]  194.77,94.34 0 top
JP281  FIDUCIAL1X2  [FIDUCIAL-1X2]  174.65,80.37 0 bottom
JP282  FIDUCIAL1X2  [FIDUCIAL-1X2]  194.77,94.34 0 bottom
JP283  LOGO-SFESK  [SFE-LOGO-FLAME]  217.81,87.38 270 bottom
JP284  [1X06-SMD-FEMALE-V2]  206.38,86.61 90 bottom
JP285  FIDUCIAL1X2  [FIDUCIAL-1X2]  202.44,79.22 0 top
JP286  FIDUCIAL1X2  [FIDUCIAL-1X2]  220.17,94.34 0 top
JP287  FIDUCIAL1X2  [FIDUCIAL-1X2]  200.05,80.37 0 bottom
JP288  FIDUCIAL1X2  [FIDUCIAL-1X2]  220.17,94.34 0 bottom
JP289  LOGO-SFESK  [SFE-LOGO-FLAME]  243.21,87.38 270 bottom
JP290  [1X06-SMD-FEMALE-V2]  231.78,86.61 90 bottom
JP291  FIDUCIAL1X2  [FIDUCIAL-1X2]  227.84,79.22 0 top
JP292  FIDUCIAL1X2  [FIDUCIAL-1X2]  245.57,94.34 0 top
JP293  FIDUCIAL1X2  [FIDUCIAL-1X2]  225.45,80.37 0 bottom
JP294  FIDUCIAL1X2  [FIDUCIAL-1X2]  245.57,94.34 0 bottom
JP295  LOGO-SFESK  [SFE-LOGO-FLAME]  268.61,87.38 270 bottom
JP296  [1X06-SMD-FEMALE-V2]  257.18,86.61 90 bottom
JP297  FIDUCIAL1X2  [FIDUCIAL-1X2]  253.24,79.22 0 top
JP298  FIDUCIAL1X2  [FIDUCIAL-1X2]  270.97,94.34 0 top
JP299  FIDUCIAL1X2  [FIDUCIAL-1X2]  250.85,80.37 0 bottom
JP300  FIDUCIAL1X2  [FIDUCIAL-1X2]  270.97,94.34 0 bottom
LED1  Red  [LED-0603]  13.84,22.35 270 top
LED2  Green  [LED-0603]  16.51,22.35 90 top
LED3  Red  [LED-0603]  39.24,22.35 270 top
LED4  Green  [LED-0603]  41.91,22.35 90 top
LED5  Red  [LED-0603]  64.64,22.35 270 top
LED6  Green  [LED-0603]  67.31,22.35 90 top
LED7  Red  [LED-0603]  90.04,22.35 270 top
LED8  Green  [LED-0603]  92.71,22.35 90 top
LED9  Red  [LED-0603]  115.44,22.35 270 top
LED10  Green  [LED-0603]  118.11,22.35 90 top
LED11  Red  [LED-0603]  13.84,40.13 270 top
LED12  Green  [LED-0603]  16.51,40.13 90 top
LED13  Red  [LED-0603]  39.24,40.13 270 top
LED14  Green  [LED-0603]  41.91,40.13 90 top
LED15  Red  [LED-0603]  64.64,40.13 270 top
LED16  Green  [LED-0603]  67.31,40.13 90 top
LED17  Red  [LED-0603]  90.04,40.13 270 top
LED18  Green  [LED-0603]  92.71,40.13 90 top
LED19  Red  [LED-0603]  115.44,40.13 270 top
LED20  Green  [LED-0603]  118.11,40.13 90 top
LED21  Red  [LED-0603]  13.84,57.91 270 top
LED22  Green  [LED-0603]  16.51,57.91 90 top
LED23  Red  [LED-0603]  39.24,57.91 270 top
LED24  Green  [LED-0603]  41.91,57.91 90 top
LED25  Red  [LED-0603]  64.64,57.91 270 top
LED26  Green  [LED-0603]  67.31,57.91 90 top
LED27  Red  [LED-0603]  90.04,57.91 270 top
LED28  Green  [LED-0603]  92.71,57.91 90 top
LED29  Red  [LED-0603]  115.44,57.91 270 top
LED30  Green  [LED-0603]  118.11,57.91 90 top
LED31  Red  [LED-0603]  13.84,75.69 270 top
LED32  Green  [LED-0603]  16.51,75.69 90 top
LED33  Red  [LED-0603]  39.24,75.69 270 top
LED34  Green  [LED-0603]  41.91,75.69 90 top
LED35  Red  [LED-0603]  64.64,75.69 270 top
LED36  Green  [LED-0603]  67.31,75.69 90 top
LED37  Red  [LED-0603]  90.04,75.69 270 top
LED38  Green  [LED-0603]  92.71,75.69 90 top
LED39  Red  [LED-0603]  115.44,75.69 270 top
LED40  Green  [LED-0603]  118.11,75.69 90 top
LED41  Red  [LED-0603]  13.84,93.47 270 top
LED42  Green  [LED-0603]  16.51,93.47 90 top
LED43  Red  [LED-0603]  39.24,93.47 270 top
LED44  Green  [LED-0603]  41.91,93.47 90 top
LED45  Red  [LED-0603]  64.64,93.47 270 top
LED46  Green  [LED-0603]  67.31,93.47 90 top
LED47  Red  [LED-0603]  90.04,93.47 270 top
LED48  Green  [LED-0603]  92.71,93.47 90 top
LED49  Red  [LED-0603]  115.44,93.47 270 top
LED50  Green  [LED-0603]  118.11,93.47 90 top
LED51  Red  [LED-0603]  154.56,22.35 270 top
LED52  Green  [LED-0603]  157.23,22.35 90 top
LED53  Red  [LED-0603]  179.96,22.35 270 top
LED54  Green  [LED-0603]  182.63,22.35 90 top
LED55  Red  [LED-0603]  205.36,22.35 270 top
LED56  Green  [LED-0603]  208.03,22.35 90 top
LED57  Red  [LED-0603]  230.76,22.35 270 top
LED58  Green  [LED-0603]  233.43,22.35 90 top
LED59  Red  [LED-0603]  256.16,22.35 270 top
LED60  Green  [LED-0603]  258.83,22.35 90 top
LED61  Red  [LED-0603]  154.56,40.13 270 top
LED62  Green  [LED-0603]  157.23,40.13 90 top
LED63  Red  [LED-0603]  179.96,40.13 270 top
LED64  Green  [LED-0603]  182.63,40.13 90 top
LED65  Red  [LED-0603]  205.36,40.13 270 top
LED66  Green  [LED-0603]  208.03,40.13 90 top
LED67  Red  [LED-0603]  230.76,40.13 270 top
LED68  Green  [LED-0603]  233.43,40.13 90 top
LED69  Red  [LED-0603]  256.16,40.13 270 top
LED70  Green  [LED-0603]  258.83,40.13 90 top
LED71  Red  [LED-0603]  154.56,57.91 270 top
LED72  Green  [LED-0603]  157.23,57.91 90 top
LED73  Red  [LED-0603]  179.96,57.91 270 top
LED74  Green  [LED-0603]  182.63,57.91 90 top
LED75  Red  [LED-0603]  205.36,57.91 270 top
LED76  Green  [LED-0603]  208.03,57.91 90 top
LED77  Red  [LED-0603]  230.76,57.91 270 top
LED78  Green  [LED-0603]  233.43,57.91 90 top
LED79  Red  [LED-0603]  256.16,57.91 270 top
LED80  Green  [LED-0603]  258.83,57.91 90 top
LED81  Red  [LED-0603]  154.56,75.69 270 top
LED82  Green  [LED-0603]  157.23,75.69 90 top
LED83  Red  [LED-0603]  179.96,75.69 270 top
LED84  Green  [LED-0603]  182.63,75.69 90 top
LED85  Red  [LED-0603]  205.36,75.69 270 top
LED86  Green  [LED-0603]  208.03,75.69 90 top
LED87  Red  [LED-0603]  230.76,75.69 270 top
LED88  Green  [LED-0603]  233.43,75.69 90 top
LED89  Red  [LED-0603]  256.16,75.69 270 top
LED90  Green  [LED-0603]  258.83,75.69 90 top
LED91  Red  [LED-0603]  154.56,93.47 270 top
LED92  Green  [LED-0603]  157.23,93.47 90 top
LED93  Red  [LED-0603]  179.96,93.47 270 top
LED94  Green  [LED-0603]  182.63,93.47 90 top
LED95  Red  [LED-0603]  205.36,93.47 270 top
LED96  Green  [LED-0603]  208.03,93.47 90 top
LED97  Red  [LED-0603]  230.76,93.47 270 top
LED98  Green  [LED-0603]  233.43,93.47 90 top
LED99  Red  [LED-0603]  256.16,93.47 270 top
LED100  Green  [LED-0603]  258.83,93.47 90 top
LOGO1  OSHW-LOGOS  [OSHW-LOGO-S]  23.37,22.1 0 bottom
LOGO2  OSHW-LOGOS  [OSHW-LOGO-S]  48.77,22.1 0 bottom
LOGO3  OSHW-LOGOS  [OSHW-LOGO-S]  74.17,22.1 0 bottom
LOGO4  OSHW-LOGOS  [OSHW-LOGO-S]  99.57,22.1 0 bottom
LOGO5  OSHW-LOGOS  [OSHW-LOGO-S]  124.97,22.1 0 bottom
LOGO6  OSHW-LOGOS  [OSHW-LOGO-S]  23.37,39.88 0 bottom
LOGO7  OSHW-LOGOS  [OSHW-LOGO-S]  48.77,39.88 0 bottom
LOGO8  OSHW-LOGOS  [OSHW-LOGO-S]  74.17,39.88 0 bottom
LOGO9  OSHW-LOGOS  [OSHW-LOGO-S]  99.57,39.88 0 bottom
LOGO10  OSHW-LOGOS  [OSHW-LOGO-S]  124.97,39.88 0 bottom
LOGO11  OSHW-LOGOS  [OSHW-LOGO-S]  23.37,57.66 0 bottom
LOGO12  OSHW-LOGOS  [OSHW-LOGO-S]  48.77,57.66 0 bottom
LOGO13  OSHW-LOGOS  [OSHW-LOGO-S]  74.17,57.66 0 bottom
LOGO14  OSHW-LOGOS  [OSHW-LOGO-S]  99.57,57.66 0 bottom
LOGO15  OSHW-LOGOS  [OSHW-LOGO-S]  124.97,57.66 0 bottom
LOGO16  OSHW-LOGOS  [OSHW-LOGO-S]  23.37,75.44 0 bottom
LOGO17  OSHW-LOGOS  [OSHW-LOGO-S]  48.77,75.44 0 bottom
LOGO18  OSHW-LOGOS  [OSHW-LOGO-S]  74.17,75.44 0 bottom
LOGO19  OSHW-LOGOS  [OSHW-LOGO-S]  99.57,75.44 0 bottom
LOGO20  OSHW-LOGOS  [OSHW-LOGO-S]  124.97,75.44 0 bottom
LOGO21  OSHW-LOGOS  [OSHW-LOGO-S]  23.37,93.22 0 bottom
LOGO22  OSHW-LOGOS  [OSHW-LOGO-S]  48.77,93.22 0 bottom
LOGO23  OSHW-LOGOS  [OSHW-LOGO-S]  74.17,93.22 0 bottom
LOGO24  OSHW-LOGOS  [OSHW-LOGO-S]  99.57,93.22 0 bottom
LOGO25  OSHW-LOGOS  [OSHW-LOGO-S]  124.97,93.22 0 bottom
LOGO26  OSHW-LOGOS  [OSHW-LOGO-S]  164.08,22.1 0 bottom
LOGO27  OSHW-LOGOS  [OSHW-LOGO-S]  189.48,22.1 0 bottom
LOGO28  OSHW-LOGOS  [OSHW-LOGO-S]  214.88,22.1 0 bottom
LOGO29  OSHW-LOGOS  [OSHW-LOGO-S]  240.28,22.1 0 bottom
LOGO30  OSHW-LOGOS  [OSHW-LOGO-S]  265.68,22.1 0 bottom
LOGO31  OSHW-LOGOS  [OSHW-LOGO-S]  164.08,39.88 0 bottom
LOGO32  OSHW-LOGOS  [OSHW-LOGO-S]  189.48,39.88 0 bottom
LOGO33  OSHW-LOGOS  [OSHW-LOGO-S]  214.88,39.88 0 bottom
LOGO34  OSHW-LOGOS  [OSHW-LOGO-S]  240.28,39.88 0 bottom
LOGO35  OSHW-LOGOS  [OSHW-LOGO-S]  265.68,39.88 0 bottom
LOGO36  OSHW-LOGOS  [OSHW-LOGO-S]  164.08,57.66 0 bottom
LOGO37  OSHW-LOGOS  [OSHW-LOGO-S]  189.48,57.66 0 bottom
LOGO38  OSHW-LOGOS  [OSHW-LOGO-S]  214.88,57.66 0 bottom
LOGO39  OSHW-LOGOS  [OSHW-LOGO-S]  240.28,57.66 0 bottom
LOGO40  OSHW-LOGOS  [OSHW-LOGO-S]  265.68,57.66 0 bottom
LOGO41  OSHW-LOGOS  [OSHW-LOGO-S]  164.08,75.44 0 bottom
LOGO42  OSHW-LOGOS  [OSHW-LOGO-S]  189.48,75.44 0 bottom
LOGO43  OSHW-LOGOS  [OSHW-LOGO-S]  214.88,75.44 0 bottom
LOGO44  OSHW-LOGOS  [OSHW-LOGO-S]  240.28,75.44 0 bottom
LOGO45  OSHW-LOGOS  [OSHW-LOGO-S]  265.68,75.44 0 bottom
LOGO46  OSHW-LOGOS  [OSHW-LOGO-S]  164.08,93.22 0 bottom
LOGO47  OSHW-LOGOS  [OSHW-LOGO-S]  189.48,93.22 0 bottom
LOGO48  OSHW-LOGOS  [OSHW-LOGO-S]  214.88,93.22 0 bottom
LOGO49  OSHW-LOGOS  [OSHW-LOGO-S]  240.28,93.22 0 bottom
LOGO50  OSHW-LOGOS  [OSHW-LOGO-S]  265.68,93.22 0 bottom
R1  1K  [0603-RES]  10.92,22.35 180 top
R2  1K  [0603-RES]  19.43,22.35 0 top
R3  1K  [0603-RES]  36.32,22.35 180 top
R4  1K  [0603-RES]  44.83,22.35 0 top
R5  1K  [0603-RES]  61.72,22.35 180 top
R6  1K  [0603-RES]  70.23,22.35 0 top
R7  1K  [0603-RES]  87.12,22.35 180 top
R8  1K  [0603-RES]  95.63,22.35 0 top
R9  1K  [0603-RES]  112.52,22.35 180 top
R10  1K  [0603-RES]  121.03,22.35 0 top
R11  1K  [0603-RES]  10.92,40.13 180 top
R12  1K  [0603-RES]  19.43,40.13 0 top
R13  1K  [0603-RES]  36.32,40.13 180 top
R14  1K  [0603-RES]  44.83,40.13 0 top
R15  1K  [0603-RES]  61.72,40.13 180 top
R16  1K  [0603-RES]  70.23,40.13 0 top
R17  1K  [0603-RES]  87.12,40.13 180 top
R18  1K  [0603-RES]  95.63,40.13 0 top
R19  1K  [0603-RES]  112.52,40.13 180 top
R20  1K  [0603-RES]  121.03,40.13 0 top
R21  1K  [0603-RES]  10.92,57.91 180 top
R22  1K  [0603-RES]  19.43,57.91 0 top
R23  1K  [0603-RES]  36.32,57.91 180 top
R24  1K  [0603-RES]  44.83,57.91 0 top
R25  1K  [0603-RES]  61.72,57.91 180 top
R26  1K  [0603-RES]  70.23,57.91 0 top
R27  1K  [0603-RES]  87.12,57.91 180 top
R28  1K  [0603-RES]  95.63,57.91 0 top
R29  1K  [0603-RES]  112.52,57.91 180 top
R30  1K  [0603-RES]  121.03,57.91 0 top
R31  1K  [0603-RES]  10.92,75.69 180 top
R32  1K  [0603-RES]  19.43,75.69 0 top
R33  1K  [0603-RES]  36.32,75.69 180 top
R34  1K  [0603-RES]  44.83,75.69 0 top
R35  1K  [0603-RES]  61.72,75.69 180 top
R36  1K  [0603-RES]  70.23,75.69 0 top
R37  1K  [0603-RES]  87.12,75.69 180 top
R38  1K  [0603-RES]  95.63,75.69 0 top
R39  1K  [0603-RES]  112.52,75.69 180 top
R40  1K  [0603-RES]  121.03,75.69 0 top
R41  1K  [0603-RES]  10.92,93.47 180 top
R42  1K  [0603-RES]  19.43,93.47 0 top
R43  1K  [0603-RES]  36.32,93.47 180 top
R44  1K  [0603-RES]  44.83,93.47 0 top
R45  1K  [0603-RES]  61.72,93.47 180 top
R46  1K  [0603-RES]  70.23,93.47 0 top
R47  1K  [0603-RES]  87.12,93.47 180 top
R48  1K  [0603-RES]  95.63,93.47 0 top
R49  1K  [0603-RES]  112.52,93.47 180 top
R50  1K  [0603-RES]  121.03,93.47 0 top
R51  1K  [0603-RES]  151.64,22.35 180 top
R52  1K  [0603-RES]  160.15,22.35 0 top
R53  1K  [0603-RES]  177.04,22.35 180 top
R54  1K  [0603-RES]  185.55,22.35 0 top
R55  1K  [0603-RES]  202.44,22.35 180 top
R56  1K  [0603-RES]  210.95,22.35 0 top
R57  1K  [0603-RES]  227.84,22.35 180 top
R58  1K  [0603-RES]  236.35,22.35 0 top
R59  1K  [0603-RES]  253.24,22.35 180 top
R60  1K  [0603-RES]  261.75,22.35 0 top
R61  1K  [0603-RES]  151.64,40.13 180 top
R62  1K  [0603-RES]  160.15,40.13 0 top
R63  1K  [0603-RES]  177.04,40.13 180 top
R64  1K  [0603-RES]  185.55,40.13 0 top
R65  1K  [0603-RES]  202.44,40.13 180 top
R66  1K  [0603-RES]  210.95,40.13 0 top
R67  1K  [0603-RES]  227.84,40.13 180 top
R68  1K  [0603-RES]  236.35,40.13 0 top
R69  1K  [0603-RES]  253.24,40.13 180 top
R70  1K  [0603-RES]  261.75,40.13 0 top
R71  1K  [0603-RES]  151.64,57.91 180 top
R72  1K  [0603-RES]  160.15,57.91 0 top
R73  1K  [0603-RES]  177.04,57.91 180 top
R74  1K  [0603-RES]  185.55,57.91 0 top
R75  1K  [0603-RES]  202.44,57.91 180 top
R76  1K  [0603-RES]  210.95,57.91 0 top
R77  1K  [0603-RES]  227.84,57.91 180 top
R78  1K  [0603-RES]  236.35,57.91 0 top
R79  1K  [0603-RES]  253.24,57.91 180 top
R80  1K  [0603-RES]  261.75,57.91 0 top
R81  1K  [0603-RES]  151.64,75.69 180 top
R82  1K  [0603-RES]  160.15,75.69 0 top
R83  1K  [0603-RES]  177.04,75.69 180 top
R84  1K  [0603-RES]  185.55,75.69 0 top
R85  1K  [0603-RES]  202.44,75.69 180 top
R86  1K  [0603-RES]  210.95,75.69 0 top
R87  1K  [0603-RES]  227.84,75.69 180 top
R88  1K  [0603-RES]  236.35,75.69 0 top
R89  1K  [0603-RES]  253.24,75.69 180 top
R90  1K  [0603-RES]  261.75,75.69 0 top
R91  1K  [0603-RES]  151.64,93.47 180 top
R92  1K  [0603-RES]  160.15,93.47 0 top
R93  1K  [0603-RES]  177.04,93.47 180 top
R94  1K  [0603-RES]  185.55,93.47 0 top
R95  1K  [0603-RES]  202.44,93.47 180 top
R96  1K  [0603-RES]  210.95,93.47 0 top
R97  1K  [0603-RES]  227.84,93.47 180 top
R98  1K  [0603-RES]  236.35,93.47 0 top
R99  1K  [0603-RES]  253.24,93.47 180 top
R100  1K  [0603-RES]  261.75,93.47 0 top
SJ1  [SJ_3]  47.5,15.49 270 bottom
SJ2  [SJ_3]  22.1,15.49 270 bottom
SJ3  [SJ_3]  72.9,15.49 270 bottom
SJ4  [SJ_3]  98.3,15.49 270 bottom
SJ5  [SJ_3]  123.7,15.49 270 bottom
SJ6  [SJ_3]  22.1,33.27 270 bottom
SJ7  [SJ_3]  47.5,33.27 270 bottom
SJ8  [SJ_3]  72.9,33.27 270 bottom
SJ9  [SJ_3]  98.3,33.27 270 bottom
SJ10  [SJ_3]  123.7,33.27 270 bottom
SJ11  [SJ_3]  22.1,51.05 270 bottom
SJ12  [SJ_3]  47.5,51.05 270 bottom
SJ13  [SJ_3]  72.9,51.05 270 bottom
SJ14  [SJ_3]  98.3,51.05 270 bottom
SJ15  [SJ_3]  123.7,51.05 270 bottom
SJ16  [SJ_3]  22.1,68.83 270 bottom
SJ17  [SJ_3]  47.5,68.83 270 bottom
SJ18  [SJ_3]  72.9,68.83 270 bottom
SJ19  [SJ_3]  98.3,68.83 270 bottom
SJ20  [SJ_3]  123.7,68.83 270 bottom
SJ21  [SJ_3]  22.1,86.61 270 bottom
SJ22  [SJ_3]  47.5,86.61 270 bottom
SJ23  [SJ_3]  72.9,86.61 270 bottom
SJ24  [SJ_3]  98.3,86.61 270 bottom
SJ25  [SJ_3]  123.7,86.61 270 bottom
SJ26  [SJ_3]  162.81,15.49 270 bottom
SJ27  [SJ_3]  188.21,15.49 270 bottom
SJ28  [SJ_3]  213.61,15.49 270 bottom
SJ29  [SJ_3]  239.01,15.49 270 bottom
SJ30  [SJ_3]  264.41,15.49 270 bottom
SJ31  [SJ_3]  162.81,33.27 270 bottom
SJ32  [SJ_3]  188.21,33.27 270 bottom
SJ33  [SJ_3]  213.61,33.27 270 bottom
SJ34  [SJ_3]  239.01,33.27 270 bottom
SJ35  [SJ_3]  264.41,33.27 270 bottom
SJ36  [SJ_3]  162.81,51.05 270 bottom
SJ37  [SJ_3]  188.21,51.05 270 bottom
SJ38  [SJ_3]  213.61,51.05 270 bottom
SJ39  [SJ_3]  239.01,51.05 270 bottom
SJ40  [SJ_3]  264.41,51.05 270 bottom
SJ41  [SJ_3]  162.81,68.83 270 bottom
SJ42  [SJ_3]  188.21,68.83 270 bottom
SJ43  [SJ_3]  213.61,68.83 270 bottom
SJ44  [SJ_3]  239.01,68.83 270 bottom
SJ45  [SJ_3]  264.41,68.83 270 bottom
SJ46  [SJ_3]  162.81,86.61 270 bottom
SJ47  [SJ_3]  188.21,86.61 270 bottom
SJ48  [SJ_3]  213.61,86.61 270 bottom
SJ49  [SJ_3]  239.01,86.61 270 bottom
SJ50  [SJ_3]  264.41,86.61 270 bottom
U1  FT232RLSSOP  [SSOP28DB]  14.48,15.49 0 top
U2  FT232RLSSOP  [SSOP28DB]  39.88,15.49 0 top
U3  FT232RLSSOP  [SSOP28DB]  65.28,15.49 0 top
U4  FT232RLSSOP  [SSOP28DB]  90.68,15.49 0 top
U5  FT232RLSSOP  [SSOP28DB]  116.08,15.49 0 top
U6  FT232RLSSOP  [SSOP28DB]  14.48,33.27 0 top
U7  FT232RLSSOP  [SSOP28DB]  39.88,33.27 0 top
U8  FT232RLSSOP  [SSOP28DB]  65.28,33.27 0 top
U9  FT232RLSSOP  [SSOP28DB]  90.68,33.27 0 top
U10  FT232RLSSOP  [SSOP28DB]  116.08,33.27 0 top
U11  FT232RLSSOP  [SSOP28DB]  14.48,51.05 0 top
U12  FT232RLSSOP  [SSOP28DB]  39.88,51.05 0 top
U13  FT232RLSSOP  [SSOP28DB]  65.28,51.05 0 top
U14  FT232RLSSOP  [SSOP28DB]  90.68,51.05 0 top
U15  FT232RLSSOP  [SSOP28DB]  116.08,51.05 0 top
U16  FT232RLSSOP  [SSOP28DB]  14.48,68.83 0 top
U17  FT232RLSSOP  [SSOP28DB]  39.88,68.83 0 top
U18  FT232RLSSOP  [SSOP28DB]  65.28,68.83 0 top
U19  FT232RLSSOP  [SSOP28DB]  90.68,68.83 0 top
U20  FT232RLSSOP  [SSOP28DB]  116.08,68.83 0 top
U21  FT232RLSSOP  [SSOP28DB]  14.48,86.61 0 top
U22  FT232RLSSOP  [SSOP28DB]  39.88,86.61 0 top
U23  FT232RLSSOP  [SSOP28DB]  65.28,86.61 0 top
U24  FT232RLSSOP  [SSOP28DB]  90.68,86.61 0 top
U25  FT232RLSSOP  [SSOP28DB]  116.08,86.61 0 top
U26  FT232RLSSOP  [SSOP28DB]  155.19,15.49 0 top
U27  FT232RLSSOP  [SSOP28DB]  180.59,15.49 0 top
U28  FT232RLSSOP  [SSOP28DB]  205.99,15.49 0 top
U29  FT232RLSSOP  [SSOP28DB]  231.39,15.49 0 top
U30  FT232RLSSOP  [SSOP28DB]  256.79,15.49 0 top
U31  FT232RLSSOP  [SSOP28DB]  155.19,33.27 0 top
U32  FT232RLSSOP  [SSOP28DB]  180.59,33.27 0 top
U33  FT232RLSSOP  [SSOP28DB]  205.99,33.27 0 top
U34  FT232RLSSOP  [SSOP28DB]  231.39,33.27 0 top
U35  FT232RLSSOP  [SSOP28DB]  256.79,33.27 0 top
U36  FT232RLSSOP  [SSOP28DB]  155.19,51.05 0 top
U37  FT232RLSSOP  [SSOP28DB]  180.59,51.05 0 top
U38  FT232RLSSOP  [SSOP28DB]  205.99,51.05 0 top
U39  FT232RLSSOP  [SSOP28DB]  231.39,51.05 0 top
U40  FT232RLSSOP  [SSOP28DB]  256.79,51.05 0 top
U41  FT232RLSSOP  [SSOP28DB]  155.19,68.83 0 top
U42  FT232RLSSOP  [SSOP28DB]  180.59,68.83 0 top
U43  FT232RLSSOP  [SSOP28DB]  205.99,68.83 0 top
U44  FT232RLSSOP  [SSOP28DB]  231.39,68.83 0 top
U45  FT232RLSSOP  [SSOP28DB]  256.79,68.83 0 top
U46  FT232RLSSOP  [SSOP28DB]  155.19,86.61 0 top
U47  FT232RLSSOP  [SSOP28DB]  180.59,86.61 0 top
U48  FT232RLSSOP  [SSOP28DB]  205.99,86.61 0 top
U49  FT232RLSSOP  [SSOP28DB]  231.39,86.61 0 top
U50  FT232RLSSOP  [SSOP28DB]  256.79,86.61 0 top
U$1  LOGO-SFENW2  [SFE-NEW-WEB]  54.61,21.59 270 bottom
U$2  LOGO-SFENW2  [SFE-NEW-WEB]  29.21,21.59 270 bottom
U$3  LOGO-SFENW2  [SFE-NEW-WEB]  80.01,21.59 270 bottom
U$4  LOGO-SFENW2  [SFE-NEW-WEB]  105.41,21.59 270 bottom
U$5  LOGO-SFENW2  [SFE-NEW-WEB]  130.81,21.59 270 bottom
U$6  LOGO-SFENW2  [SFE-NEW-WEB]  29.21,39.37 270 bottom
U$7  LOGO-SFENW2  [SFE-NEW-WEB]  54.61,39.37 270 bottom
U$8  LOGO-SFENW2  [SFE-NEW-WEB]  80.01,39.37 270 bottom
U$9  LOGO-SFENW2  [SFE-NEW-WEB]  105.41,39.37 270 bottom
U$10  LOGO-SFENW2  [SFE-NEW-WEB]  130.81,39.37 270 bottom
U$11  LOGO-SFENW2  [SFE-NEW-WEB]  29.21,57.15 270 bottom
U$12  LOGO-SFENW2  [SFE-NEW-WEB]  54.61,57.15 270 bottom
U$13  LOGO-SFENW2  [SFE-NEW-WEB]  80.01,57.15 270 bottom
U$14  LOGO-SFENW2  [SFE-NEW-WEB]  105.41,57.15 270 bottom
U$15  LOGO-SFENW2  [SFE-NEW-WEB]  130.81,57.15 270 bottom
U$16  LOGO-SFENW2  [SFE-NEW-WEB]  29.21,74.93 270 bottom
U$17  LOGO-SFENW2  [SFE-NEW-WEB]  54.61,74.93 270 bottom
U$18  LOGO-SFENW2  [SFE-NEW-WEB]  80.01,74.93 270 bottom
U$19  LOGO-SFENW2  [SFE-NEW-WEB]  105.41,74.93 270 bottom
U$20  LOGO-SFENW2  [SFE-NEW-WEB]  130.81,74.93 270 bottom
U$21  LOGO-SFENW2  [SFE-NEW-WEB]  29.21,92.71 270 bottom
U$22  LOGO-SFENW2  [SFE-NEW-WEB]  54.61,92.71 270 bottom
U$23  LOGO-SFENW2  [SFE-NEW-WEB]  80.01,92.71 270 bottom
U$24  LOGO-SFENW2  [SFE-NEW-WEB]  105.41,92.71 270 bottom
U$25  LOGO-SFENW2  [SFE-NEW-WEB]  130.81,92.71 270 bottom
U$26  LOGO-SFENW2  [SFE-NEW-WEB]  169.93,21.59 270 bottom
U$27  LOGO-SFENW2  [SFE-NEW-WEB]  195.33,21.59 270 bottom
U$28  LOGO-SFENW2  [SFE-NEW-WEB]  220.73,21.59 270 bottom
U$29  LOGO-SFENW2  [SFE-NEW-WEB]  246.13,21.59 270 bottom
U$30  LOGO-SFENW2  [SFE-NEW-WEB]  271.53,21.59 270 bottom
U$31  LOGO-SFENW2  [SFE-NEW-WEB]  169.93,39.37 270 bottom
U$32  LOGO-SFENW2  [SFE-NEW-WEB]  195.33,39.37 270 bottom
U$33  LOGO-SFENW2  [SFE-NEW-WEB]  220.73,39.37 270 bottom
U$34  LOGO-SFENW2  [SFE-NEW-WEB]  246.13,39.37 270 bottom
U$35  LOGO-SFENW2  [SFE-NEW-WEB]  271.53,39.37 270 bottom
U$36  LOGO-SFENW2  [SFE-NEW-WEB]  169.93,57.15 270 bottom
U$37  LOGO-SFENW2  [SFE-NEW-WEB]  195.33,57.15 270 bottom
U$38  LOGO-SFENW2  [SFE-NEW-WEB]  220.73,57.15 270 bottom
U$39  LOGO-SFENW2  [SFE-NEW-WEB]  246.13,57.15 270 bottom
U$40  LOGO-SFENW2  [SFE-NEW-WEB]  271.53,57.15 270 bottom
U$41  LOGO-SFENW2  [SFE-NEW-WEB]  169.93,74.93 270 bottom
U$42  LOGO-SFENW2  [SFE-NEW-WEB]  195.33,74.93 270 bottom
U$43  LOGO-SFENW2  [SFE-NEW-WEB]  220.73,74.93 270 bottom
U$44  LOGO-SFENW2  [SFE-NEW-WEB]  246.13,74.93 270 bottom
U$45  LOGO-SFENW2  [SFE-NEW-WEB]  271.53,74.93 270 bottom
U$46  LOGO-SFENW2  [SFE-NEW-WEB]  169.93,92.71 270 bottom
U$47  LOGO-SFENW2  [SFE-NEW-WEB]  195.33,92.71 270 bottom
U$48  LOGO-SFENW2  [SFE-NEW-WEB]  220.73,92.71 270 bottom
U$49  LOGO-SFENW2  [SFE-NEW-WEB]  246.13,92.71 270 bottom
U$50  LOGO-SFENW2  [SFE-NEW-WEB]  271.53,92.71 270 bottom
X1  USB-SMD-NS  [USB-MINIB-NOSTOP]  50.55,15.49 180 top
X2  USB-SMD-NS  [USB-MINIB-NOSTOP]  25.15,15.49 180 top
X3  USB-SMD-NS  [USB-MINIB-NOSTOP]  75.95,15.49 180 top
X4  USB-SMD-NS  [USB-MINIB-NOSTOP]  101.35,15.49 180 top
X5  USB-SMD-NS  [USB-MINIB-NOSTOP]  126.75,15.49 180 top
X6  USB-SMD-NS  [USB-MINIB-NOSTOP]  25.15,33.27 180 top
X7  USB-SMD-NS  [USB-MINIB-NOSTOP]  50.55,33.27 180 top
X8  USB-SMD-NS  [USB-MINIB-NOSTOP]  75.95,33.27 180 top
X9  USB-SMD-NS  [USB-MINIB-NOSTOP]  101.35,33.27 180 top
X10  USB-SMD-NS  [USB-MINIB-NOSTOP]  126.75,33.27 180 top
X11  USB-SMD-NS  [USB-MINIB-NOSTOP]  25.15,51.05 180 top
X12  USB-SMD-NS  [USB-MINIB-NOSTOP]  50.55,51.05 180 top
X13  USB-SMD-NS  [USB-MINIB-NOSTOP]  75.95,51.05 180 top
X14  USB-SMD-NS  [USB-MINIB-NOSTOP]  101.35,51.05 180 top
X15  USB-SMD-NS  [USB-MINIB-NOSTOP]  126.75,51.05 180 top
X16  USB-SMD-NS  [USB-MINIB-NOSTOP]  25.15,68.83 180 top
X17  USB-SMD-NS  [USB-MINIB-NOSTOP]  50.55,68.83 180 top
X18  USB-SMD-NS  [USB-MINIB-NOSTOP]  75.95,68.83 180 top
X19  USB-SMD-NS  [USB-MINIB-NOSTOP]  101.35,68.83 180 top
X20  USB-SMD-NS  [USB-MINIB-NOSTOP]  126.75,68.83 180 top
X21  USB-SMD-NS  [USB-MINIB-NOSTOP]  25.15,86.61 180 top
X22  USB-SMD-NS  [USB-MINIB-NOSTOP]  50.55,86.61 180 top
X23  USB-SMD-NS  [USB-MINIB-NOSTOP]  75.95,86.61 180 top
X24  USB-SMD-NS  [USB-MINIB-NOSTOP]  101.35,86.61 180 top
X25  USB-SMD-NS  [USB-MINIB-NOSTOP]  126.75,86.61 180 top
X26  USB-SMD-NS  [USB-MINIB-NOSTOP]  165.86,15.49 180 top
X27  USB-SMD-NS  [USB-MINIB-NOSTOP]  191.26,15.49 180 top
X28  USB-SMD-NS  [USB-MINIB-NOSTOP]  216.66,15.49 180 top
X29  USB-SMD-NS  [USB-MINIB-NOSTOP]  242.06,15.49 180 top
X30  USB-SMD-NS  [USB-MINIB-NOSTOP]  267.46,15.49 180 top
X31  USB-SMD-NS  [USB-MINIB-NOSTOP]  165.86,33.27 180 top
X32  USB-SMD-NS  [USB-MINIB-NOSTOP]  191.26,33.27 180 top
X33  USB-SMD-NS  [USB-MINIB-NOSTOP]  216.66,33.27 180 top
X34  USB-SMD-NS  [USB-MINIB-NOSTOP]  242.06,33.27 180 top
X35  USB-SMD-NS  [USB-MINIB-NOSTOP]  267.46,33.27 180 top
X36  USB-SMD-NS  [USB-MINIB-NOSTOP]  165.86,51.05 180 top
X37  USB-SMD-NS  [USB-MINIB-NOSTOP]  191.26,51.05 180 top
X38  USB-SMD-NS  [USB-MINIB-NOSTOP]  216.66,51.05 180 top
X39  USB-SMD-NS  [USB-MINIB-NOSTOP]  242.06,51.05 180 top
X40  USB-SMD-NS  [USB-MINIB-NOSTOP]  267.46,51.05 180 top
X41  USB-SMD-NS  [USB-MINIB-NOSTOP]  165.86,68.83 180 top
X42  USB-SMD-NS  [USB-MINIB-NOSTOP]  191.26,68.83 180 top
X43  USB-SMD-NS  [USB-MINIB-NOSTOP]  216.66,68.83 180 top
X44  USB-SMD-NS  [USB-MINIB-NOSTOP]  242.06,68.83 180 top
X45  USB-SMD-NS  [USB-MINIB-NOSTOP]  267.46,68.83 180 top
X46  USB-SMD-NS  [USB-MINIB-NOSTOP]  165.86,86.61 180 top
X47  USB-SMD-NS  [USB-MINIB-NOSTOP]  191.26,86.61 180 top
X48  USB-SMD-NS  [USB-MINIB-NOSTOP]  216.66,86.61 180 top
X49  USB-SMD-NS  [USB-MINIB-NOSTOP]  242.06,86.61 180 top
X50  USB-SMD-NS  [USB-MINIB-NOSTOP]  267.46,86.61 180 top

## Library data of the parts
C1-C150 JP1-JP300 LED1-LED100 R1-R100 SJ1-SJ50 U1-U50 U$1-U$50 X1-X50 = SparkFun
E$1 E$2 E$9 E$10 = SparkFun-Retired
E$3-E$8 E$11 E$12 LOGO1-LOGO50 = SparkFun-Aesthetics